# EAGLE board GPS UEXT (EAGLE 9.5.1)
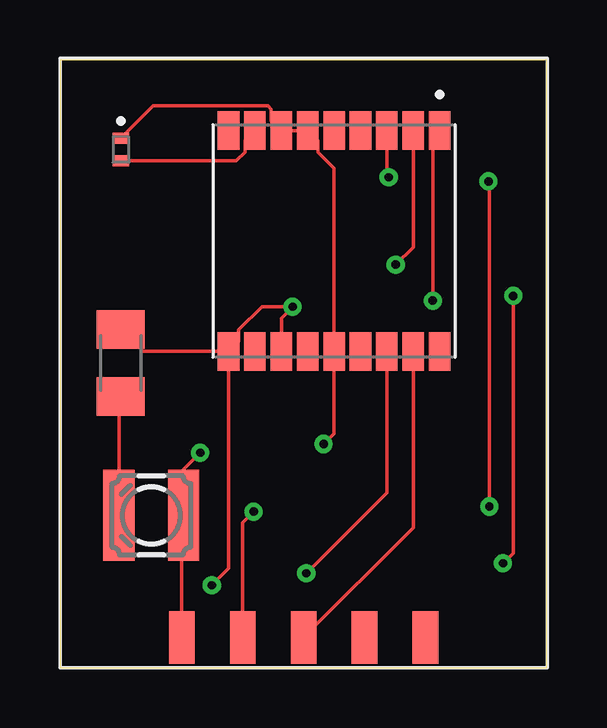
[diagram p0: board, top side]
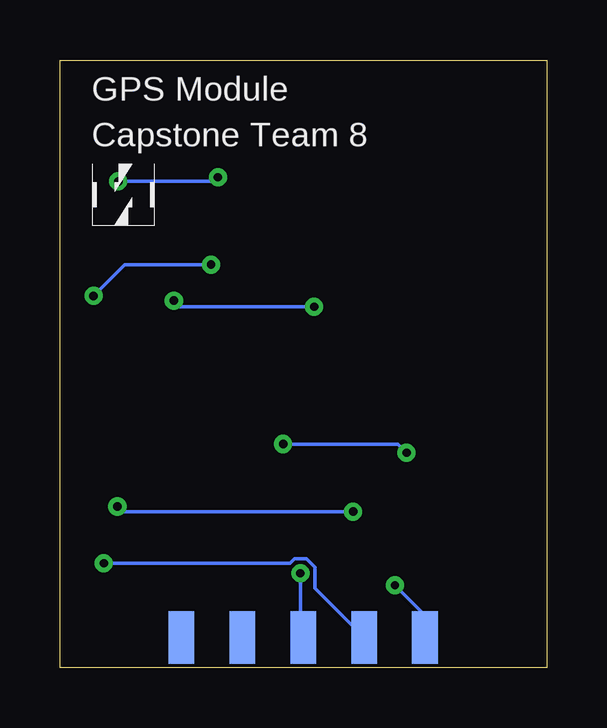
[diagram p1: board, bottom side, seen from below]

Size 20.3 x 25.32 mm. Coordinates in mm from the lower left corner, seen from the top.
Outline: 0,0 20.3,0 20.3,25.32 0,25.32 0,0
Copper layers (1*16): Top 0.035mm / dielectric 1.5mm / Bottom 0.035mm
Design rules "default": minimum track width 6mil, minimum drill 0.35mm, track to track 6mil, track to pad 6mil, pad to pad 6mil, via to via 6mil, smd to smd 6mil, copper to edge 40mil, drill to drill 6mil, minimum pad ring 10mil, minimum via ring 8mil, stop-mask expansion 4mil, vias tented up to drill 0mil, thermal gap 10mil

## Footprints (pad centres in the part's own frame; a part is rotated, then mirrored left to right if it is on the bottom)
INDC1006X60N = smd 0.46 x 0.7: 1 -0.468,0; 2 0.468,0
NFSG036BT = smd 1.3 x 3.8: A 1.35,0; C -1.35,0
M1206 = smd 1.6 x 2: 1 -1.4,0; 2 1.4,0
TESEO-LIV3F = smd 0.9 x 1.6: 1 4.4,4.6; 2 3.3,4.6; 3 2.2,4.6; 4 1.1,4.6; 5 0,4.6; 6 -1.1,4.6; 7 -2.2,4.6; 8 -3.3,4.6; 9 -4.4,4.6; 10 -4.4,-4.6; 11 -3.3,-4.6; 12 -2.2,-4.6; 13 -1.1,-4.6; 14 0,-4.6; 15 1.1,-4.6; 16 2.2,-4.6; 17 3.3,-4.6; 18 4.4,-4.6
UEXT-SMD = smd 1.067 x 2.184: 1 -5.08,0; 3 -2.54,0; 5 0,0; 7 2.54,0; 9 5.08,0 | smd 1.067 x 2.184 bottom: 2 -5.08,0; 4 -2.54,0; 6 0,0; 8 2.54,0; 10 5.08,0

## Placement (x,y rotation side)
L1  LQG15WZ27NG02D  [INDC1006X60N]  2.54,21.59 90 top
LED4  NFSG036BT  [NFSG036BT]  3.81,6.35 0 top
R6  1k  [M1206]  2.54,12.7 270 top
U2  TESEO-LIV3F  [TESEO-LIV3F]  11.43,17.78 0 top
U$9  UEXT-SMD  [UEXT-SMD]  10.16,1.27 0 top

## Library data of the parts
L1 = LQG15WZ27NG02D; AVAILABILITY: Unavailable; DESCRIPTION: Inductor with Inductance: 27nH Tol. +/-2%, Package: 0402 _1005_; MF: Murata; MP: LQG15WZ27NG02D; PACKAGE: 1006 Murata; PRICE: None
LED4 = led
R6 = rcl; SPICEPREFIX: R
U2 = TESEO-LIV3F; AVAILABILITY: Unavailable; DESCRIPTION: - RF Receiver BeiDou, Galileo, GLONASS, GNSS, GPS 1.575GHz -163dBm 18-LCC _9.7x10.1_; MF: STMicroelectronics; MP: TESEO-LIV3F; PACKAGE: SMD-18 STMicroelectronics; PRICE: None
U$9 = UEXT-Connecotr

## Nets
N$1: U2.2 U$9.4
N$2: U2.3 U$9.3
N$3: L1.1 U2.8
N$21: R6.1 U2.1 U2.10 U2.12 U$9.2
N$22: L1.2 LED4.A U2.6 U2.7 U2.14 U$9.1
N$23: U2.17 U$9.5
N$24: U2.16 U$9.6
N$25: LED4.C R6.2

## Tracks (layer width: path | path; a pad name or v marks a point on that pad's centre or on a via)
N$1  (via drill 0.35)
  Top 0.152: U2.2 14.73,17.53 v14,16.8 | v18.9,15.5 18.9,4.78 v18.47,4.36
  Bottom 0.152: v14,16.8 17.6,16.8 v18.9,15.5 | v18.47,4.36 10.71,4.36 10.52,4.54 10.02,4.54 9.66,4.19 9.66,3.31 U$9.4
N$2  (via drill 0.35)
  Top 0.152: U$9.3 7.62,6.05 v8.08,6.51 | v17.91,6.72 17.91,20.23 v17.87,20.27 | v13.71,20.44 13.63,20.52 U2.3
  Bottom 0.152: v8.08,6.51 17.69,6.51 v17.91,6.72 | v17.87,20.27 13.88,20.27 v13.71,20.44
N$3
  Top 0.152: U2.8 7.71,21.96 7.71,21.48 7.34,21.12 L1.1
N$21  (via drill 0.35)
  Top 0.152: R6.1 3.46,13.18 U2.10 | U2.12 9.23,14.57 v9.7,15.04 8.42,15.04 7.45,14.08 7.45,13.6 U2.10 | v15.55,15.3 15.55,22.1 U2.1 | U2.10 7.03,4.14 v6.33,3.44
  Bottom 0.152: v9.7,15.04 15.29,15.04 v15.55,15.3 | v6.33,3.44 5.08,2.19 U$9.2
N$22  (via drill 0.35)
  Top 0.152: U$9.1 5.08,6.27 LED4.A 5.16,8.27 v5.85,8.96 | v10.99,9.32 11.43,9.76 U2.14 11.43,20.81 10.75,21.48 10.75,21.96 U2.6 U2.7 8.81,22.8 8.81,23.28 8.68,23.41 3.89,23.41 L1.2
  Bottom 0.152: v10.99,9.32 6.21,9.32 v5.85,8.96
N$23
  Top 0.152: U2.17 14.73,5.84 U$9.5
N$24  (via drill 0.35)
  Top 0.152: U2.16 13.63,7.3 v10.27,3.94
  Bottom 0.152: v10.27,3.94 10.27,1.38 U$9.6
N$25
  Top 0.152: LED4.C 2.46,11.22 R6.2

## Text on the board
bNames: GPS Module | Capstone Team 8